# Altium PCB FEU31_Part2.PcbDoc
Units mm, origin at the board's own origin, x right, y up, seen from the top; angles counter-clockwise.
Board outline 43.83 x 14.67 mm, 2 copper layers (Top Layer, Bottom Layer), stack 1.021 mm thick; 24 components, 13 nets, 56 pads, 73 vias.
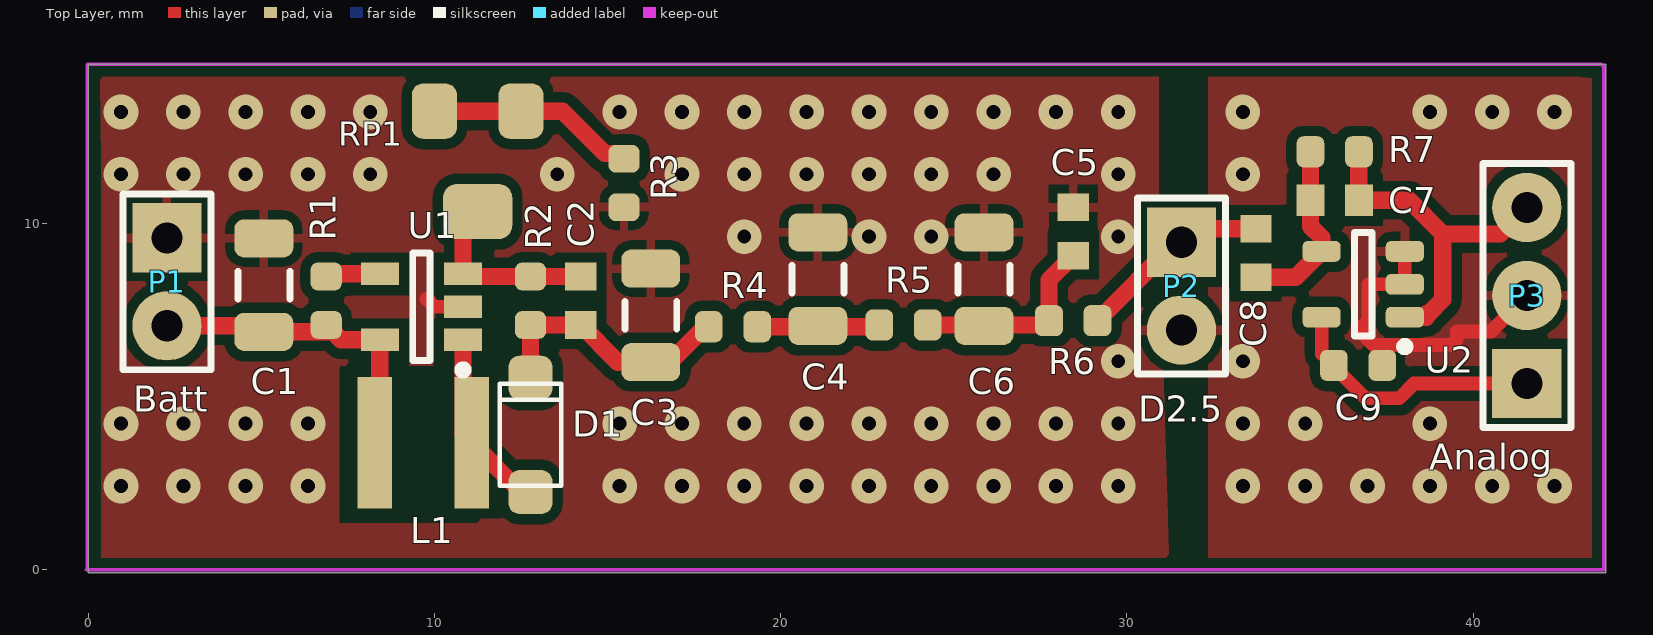
[diagram p0: Top Layer view]
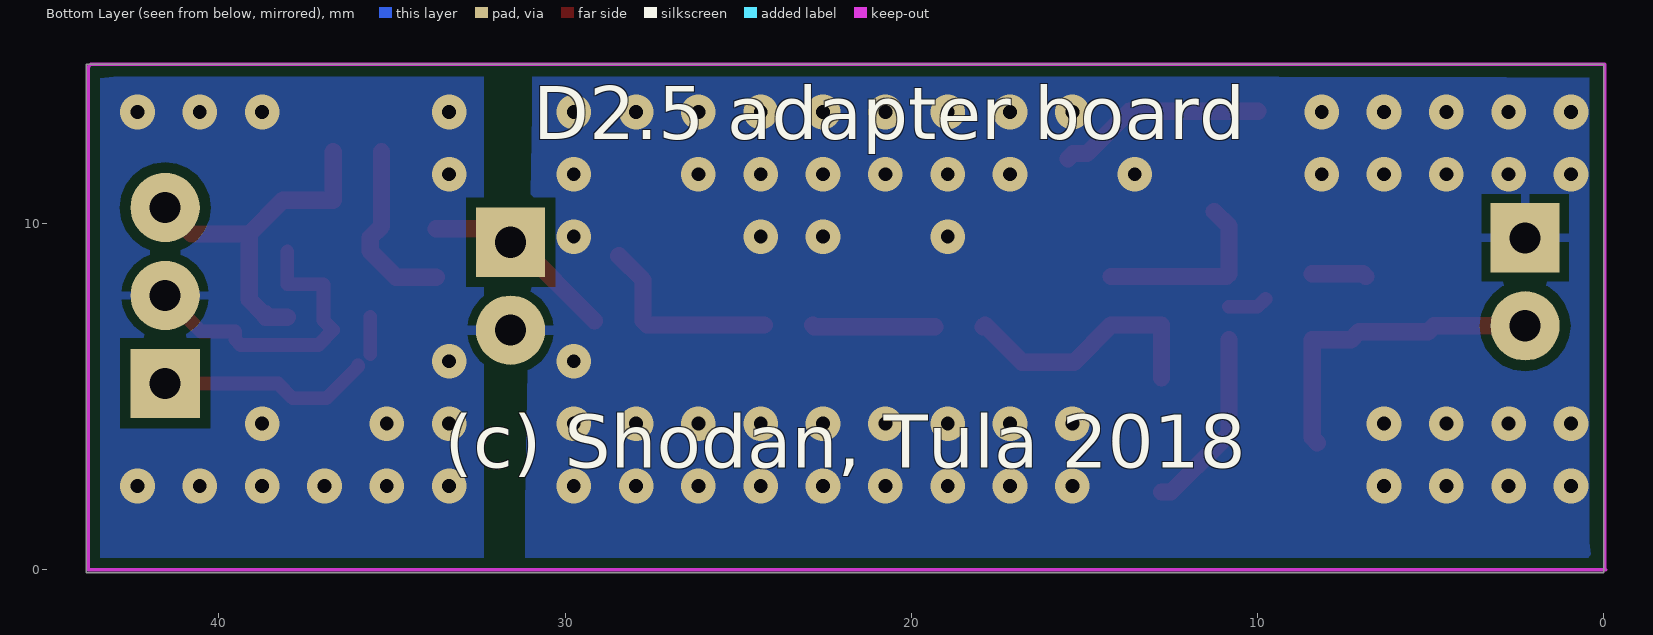
[diagram p1: Bottom Layer view, seen from below]
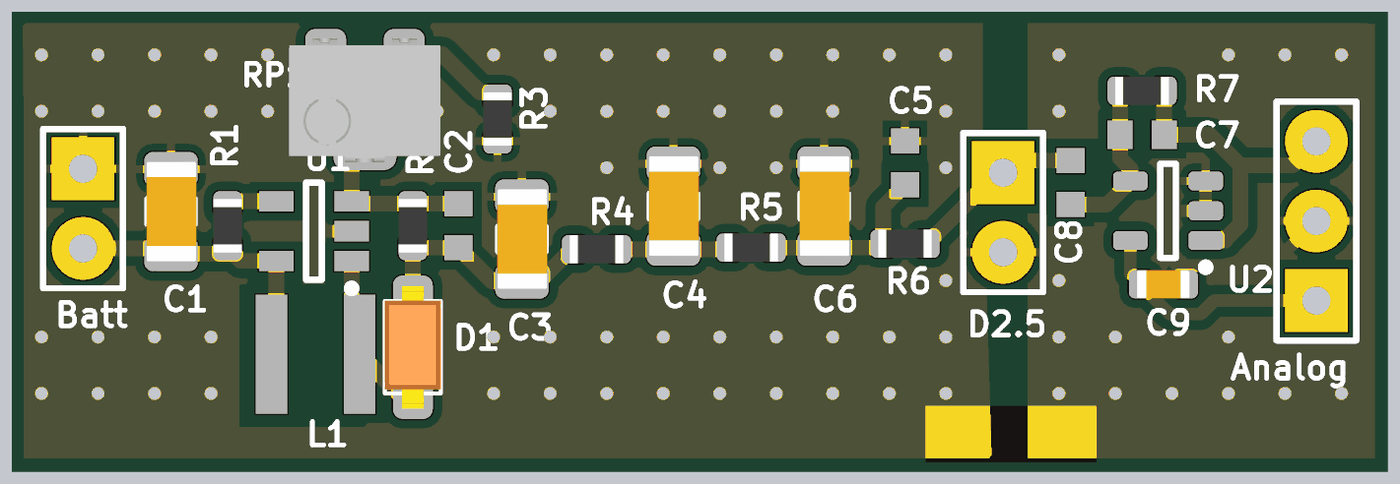
[diagram p2: 3D render of the assembled board from above, using the file's embedded part models]

## Layer stack, top to bottom
Top Solder: solder mask 0.0102, Solder Resist, Dk 3.5
Top Layer: signal copper 0.0356
Dielectric1: dielectric 0.95, FR-4, Dk 4.8
Bottom Layer: signal copper 0.0356
Bottom Solder: solder mask 0.0102, Solder Resist, Dk 3.5

## Board outline
0,-0.075 43.825,-0.075 43.825,14.6 0,14.6

## Design rules (kind name [scope] priority, off if disabled: settings)
Clearance [All] p1: gap=0.3
ComponentClearance [All] p1: gap=0.1 collisioncheckmode=3 verticalgap=0.254 showdistances=TRUE
HoleSize [All] p1: absolutevalues=TRUE maxlimit=2.54 minlimit=0.3 maxpercent=80.000 minpercent=20.000
HoleToHoleClearance [All] p1: gap=0.2 allowstackedmicrovias=TRUE
MinimumAnnularRing [All] p1: minimumring=0.3
MinimumSolderMaskSliver [All] p1: minsoldermaskwidth=0.152
PlaneClearance [All] p1: clearance=2
PlaneConnect [All] p1: planeconnectstyle=Relief reliefexpansion=0.457 reliefentries=4 reliefconductorwidth=0.3 reliefairgap=0.457
PolygonConnect PolygonConnect_via [IsVia] p1: connectstyle=Direct reliefconductorwidth=0.254 reliefentries=4 polygonreliefangle="90 Angle" airgapwidth=0.254
PolygonConnect [All] p2: connectstyle=Relief reliefconductorwidth=0.254 reliefentries=4 polygonreliefangle="90 Angle" airgapwidth=0.254
RoutingVias [All] p1: holewidth=0.3 width=0.62 viastyle="Through Hole" minholewidth=0.3 minwidth=0.62 maxholewidth=6 maxwidth=4
SilkToSilkClearance [All] p1: silktosilkclearance=0.152
SilkToSolderMaskClearance SilkscreenOverComponentPads [IsPad] p1: minsilkscreentomaskgap=0.1 clearancetoexposedcopper=TRUE
SolderMaskExpansion [All] p1: expansion=0.05
Width [All] p1: maxlimit=2.254 minlimit=0.4 preferedwidth=0.4
22 further rules are at their usual default settings.

## Components (designator, comment, footprint, x,y, rotation, side; value= is the part's Value field where it differs from the comment)
C1 "10uF" C1206 5.075,8.225 r90 top
C2 "120pF" 1608[0603] 14.225,7.775 r270 top
C3 "10uF" C1206 16.25,7.35 r90 top
C4 "10uF" C1206 21.075,8.4 r90 top
C5 "100nF" 1608[0603] 28.45,9.775 r270 top
C6 "10uF" C1206 25.875,8.4 r90 top
C7 "0pF" 1608[0603] 36,10.675 r0 top
C8 "470pF" 1608[0603] 33.725,9.15 r270 top
C9 "1uF" 1608[0603]_CAP 36.677,5.907 r0 top
D1 "MBR0540" SOD123 12.775,3.9 r90 top
L1 "Inductor" IFSC1515AHER100M01 7.775,5.575 r0 top
P1 "Batt" HDR1X2 2.275,9.59 r270 top
P2 "D2.5" HDR1X2 31.575,9.465 r270 top
P3 "Analog" HDR1X3 41.55,5.385 r90 top
R1 "62K" 1608[0603]_RES 6.875,7.775 r270 top
R2 "200K" 1608[0603]_RES 12.775,7.775 r90 top
R3 "10K" 1608[0603]_RES 15.475,11.175 r270 top
R4 "10K" 1608[0603]_RES 18.625,7.025 r180 top
R5 "10K" 1608[0603]_RES 23.55,7.075 r180 top
R6 "1M" 1608[0603]_RES 28.45,7.2 r180 top
R7 "10M" 1608[0603]_RES 36,12.075 r0 top
RP1 "10k" 3224W 11.25,10.35 r180 top
U1 "LM2733XMF/NOPB" MF05A_N 9.625,7.6 r180 top
U2 "OPA353NA" ADI-RJ-5_N 36.825,8.25 r180 top

## Footprints (in the part's own frame and the unit in brackets; to place one, negate y for a bottom-side part, rotate by r counter-clockwise, add the part's x,y. Pads: shape width x height; smd on the part's side, far side on the other; paste and mask are expansions set on the pad)
1608[0603] [mm] "Chip Capacitor, Body 1.6x0.8mm, IPC High Density"
  rect 0.8x0.9 smd: 1(-0.7,0) 2(0.7,0)
  body extent -0.87,-0.48 0.87,0.48, height 1.3
1608[0603]_CAP [mm] "Chip Capacitor, Body 1.6x0.8mm, IPC High Density"
  rrect50% 0.8x0.9 smd: 1(-0.7,0) 2(0.7,0)
  body extent -0.85,-0.45 0.85,0.45, height 0.8
1608[0603]_RES [mm] "Chip Capacitor, Body 1.6x0.8mm, IPC High Density"
  rrect50% 0.8x0.9 smd: 1(-0.7,0) 2(0.7,0)
  body extent -0.85,-0.45 0.85,0.45, height 0.45
3224W [mm]
  rrect50% 1.3x1.6 smd: 1(-1.25,-2.9) 2(1.25,-2.9)
  rrect50% 2x1.6 smd: 3(0,0)
  body extent -2.41,-3.4 2.42,0.56, height 5.29
ADI-RJ-5_N [mm] "SOT-23, 5-Leads, Body 2.9x1.6mm, Pitch 0.95mm, IPC Medium Density"
  rrect50% 1.1x0.6 smd: 1(-1.2,0.95) 2(-1.2,0) 3(-1.2,-0.95) 4(1.2,-0.95) 5(1.2,0.95)
  silkscreen extent -1.33,-1.5 0.25,1.92, body extent -0.85,-1.5 0.85,1.5, height 1.45
C1206 [mm] "Chip Capacitor, Body 3.2x1.6mm, IPC High Density"
  rrect50% 1.1x1.7 smd: 1(-1.35,0) 2(1.35,0)
  silkscreen extent -0.4,-0.75 0.4,0.75, body extent -1.6,-0.81 1.6,0.79, height 1.6
HDR1X2 [mm] "Connector; Header; 2 Position"
  rect 2x2 hole 0.9: 1(0,0)
  round 2 hole 0.9: 2(2.54,0)
  silkscreen extent -1.27,-1.27 3.81,1.27
HDR1X3 [mm] "Connector; Header; 3 Position"
  rect 2x2 hole 0.9: 1(0,0)
  round 2 hole 0.9: 2(2.54,0) 3(5.08,0)
  silkscreen extent -1.27,-1.27 6.35,1.27
IFSC1515AHER100M01 [mm]
  rect 1x3.8 smd: 1(0.5,-1.9) 2(3.3,-1.9)
  body extent 0,-3.8 3.8,0, height 1.8
MF05A_N [mm] "SOT23, 5-Leads, Body 2.9x1.6mm, Pitch 0.95mm, Lead Span 2.8mm, IPC Medium Density"
  rect 1.1x0.65 smd: 1(-1.2,0.95) 2(-1.2,0) 3(-1.2,-0.95) 4(1.2,-0.95) 5(1.2,0.95)
  silkscreen extent -1.33,-1.55 0.25,1.95, body extent -0.9,-1.55 0.9,1.55, height 1.19
SOD123 [mil]
  rrect50% 50x50 smd: 1(-65,0) 2(65,0)
  silkscreen extent -58,-35 58,35, body extent -77,-35 77,35, height 47

## Part data
C1 C2 C3 C4 C5 C6 C7 C8 C9: library part "Cap Semi", "Capacitor (Semiconductor SIM Model)"
D1: "SMD 40V 0.5A"
P1 P2: library part "Header 2", "Header, 2-Pin"
P3: library part "Header 3", "Header, 3-Pin"
R1 R2 R3 R4 R5 R6: library part Res2, "Resistor"
R7: library part "Resistor 0805"
RP1: library part "R-Tr 3296W (64W)", "Bourns 3296W 0.5W 25 Turns"
U1: "0.6/1.6 MHz Boost Converters With 40V Internal FET Switch in 5-pin SOT-23, Pb-Free"
U2: library part AD8541ARTZ-R2, "Single Channel RRIO Operational Amplifier, 1 MHz BW, 920 mV/us SR, Industrial, 5-pin SOT23 (RJ-5), Reel"

## Via types
v1: diameter 1, hole 0.4, Top Layer to Bottom Layer, tented both sides, 73 vias

## Nets (pads, with @x,y where several pads share a name; then routed paths per layer and width w, separated by ;. In a path a pad name is that pad's centre, name@x,y a point inside that pad or via, vN(x,y) a via of type N, cw(c..) or ccw(c..) an arc to the next point about the centre after c; other vN are vias at no path point)
+23V: C2.2 C3.1 D1.2 R2.1 R4.2 | length 7.6
  Top Layer w0.5: D1.2 R2.1 C2.2 15.3,6 C3.1 16.8,6 17.875,7.075 R4.2
GND: C1.2 C3.2 C4.2 C5.1 C6.2 C9.2 P1.1 P2.2 P3.2 R3.2 U1.2 U2.2 U2.3 | length 10.3
  Top Layer w0.4: 9.775,7.825 10,7.6 U1.2 ; U2.3 U2.2 36.975,8.25 36.975,7.2 36.7,6.925 37.125,6.5 39.375,6.5 39.525,6.65 39.525,6.885 40.51,6.885 P3.2
  other v1: 0.95,2.425 2.75,2.425 4.55,2.425 6.35,2.425 15.35,2.425 17.15,2.425 18.95,2.425 20.75,2.425 22.55,2.425 24.35,2.425 26.15,2.425 27.95,2.425 29.75,2.425 33.35,2.425 35.15,2.425 36.95,2.425 38.75,2.425 40.55,2.425 42.35,2.425 0.95,4.225 2.75,4.225 4.55,4.225 6.35,4.225 15.35,4.225 17.15,4.225 18.95,4.225 20.75,4.225 22.55,4.225 24.35,4.225 26.15,4.225 27.95,4.225 29.75,4.225 33.35,4.225 35.15,4.225 38.75,4.225 29.75,6.025 33.35,6.025 18.95,9.625 22.55,9.625 24.35,9.625 29.75,9.625 0.95,11.425 2.75,11.425 4.55,11.425 6.35,11.425 8.15,11.425 13.55,11.425 17.15,11.425 18.95,11.425 20.75,11.425 22.55,11.425 24.35,11.425 26.15,11.425 29.75,11.425 33.35,11.425 0.95,13.225 2.75,13.225 4.55,13.225 6.35,13.225 8.15,13.225 15.35,13.225 17.15,13.225 18.95,13.225 20.75,13.225 22.55,13.225 24.35,13.225 26.15,13.225 27.95,13.225 29.75,13.225 33.35,13.225 38.75,13.225 40.55,13.225 42.35,13.225
NetC2_1: C2.1 R2.2 RP1.3 U1.3 | length 5.4
  Top Layer w0.5: RP1.3 10.825,9.925 U1.3 10.9,8.475 C2.1
NetC4_1: C4.1 R4.1 R5.2 | length 3.5
  Top Layer w0.5: R4.1 22.8,7.025 R5.2
NetC5_2: C5.2 C6.1 R5.1 R6.2 | length 5.7
  Top Layer w0.5: R5.1 27.625,7.075 R6.2 27.75,8.375 C5.2
NetC7_1: C7.1 C8.2 R7.1 U2.4 | length 5.2
  Top Layer w0.5: C8.2 34.875,8.45 U2.4 35.625,9.6 35.3,9.925 C7.1 R7.1
NetC8_1: C8.1 P2.1 R6.1 | length 5.7
  Top Layer w0.5: R6.1 31.415,9.465 P2.1 31.96,9.85 C8.1
NetD1_1: D1.1 L1.2 U1.1 | length 5.4
  Top Layer w0.5: U1.1 10.825,3.925 L1.2 12.501,2.249 D1.1
NetR1_1: R1.1 U1.4 | length 1.6
  Top Layer w0.5: R1.1 6.95,8.55 U1.4
NetR3_1: R3.1 RP1.1 RP1.2 | length 6
  Top Layer w0.5: RP1.2 RP1.1 13.7,13.25 14.925,12.025 15.325,12.025 R3.1
SIGOUT: C7.2 P3.3 R7.2 U2.1 | length 10.2
  Top Layer w0.5: R7.2 C7.2 38.15,10.675 39.125,9.7 ; U2.1 38.65,7.3 38.65,7.4 38.715,7.4 39.125,7.81 39.125,9.7 ; P3.3 40.785,9.7 39.125,9.7
VCC: C9.1 P3.1 U2.5 | length 7.4
  Top Layer w0.4: C9.1@35.625,6.238 U2.5 ; C9.1 35.977,5.867 36.887,4.957 37.867,4.957 38.295,5.385 P3.1 P3.1@41.415,5.25
VCC_BAT: C1.1 L1.1 P1.2 R1.2 U1.5 | length 9.4
  Top Layer w0.5: P1.2 4.9,7.05 C1.1 7.075,6.875 7.3,6.65 U1.5 8.425,3.825 L1.1

## Polygon pours and split planes (outlines as drawn)
GND on Top Layer "Top Layer-No Net" (solid, pour order 0): 30.925,9.915 30.925,14.25 2.85,14.25 0.35,14.25 0.375,11.775 0.375,0.275 29.925,0.275 31.212,0.275 31.175,1.525
GND on Top Layer "Top Layer-No Net" (solid, pour order 6): 32.35,0.225 32.35,14.25 42.975,14.25 43.425,14.2 43.425,13.8 43.425,0.675 43.425,0.199 42.95,0.2
GND on Bottom Layer "Top Layer-No Net" (solid, pour order 4): 2.825,14.225 0.425,14.218 0.425,11.825 0.425,0.8 0.35,0.275 29.85,0.275 31.15,0.3 31.15,1.575 31.15,1.925 30.95,13.2 30.95,13.325 30.95,14.3 29.975,14.3
GND on Bottom Layer "Top Layer-No Net" (solid, pour order 8): 32.35,0.225 32.35,14.25 42.975,14.25 43.425,14.2 43.425,13.8 43.425,0.675 43.425,0.225 42.95,0.2

## Keep-outs
Keep-Out Layer:
  lines w0.1: -0.05,0 43.775,0 43.775,14.525 43.7,14.6 -0.025,14.6 -0.025,0.025 -0.05,0

## Other copper
Top Layer:
  pour cut-out: 7.25,5.85 7.3,5.9 11.5,5.9 11.5,1.625 11.225,1.35 7.25,1.35

## Silkscreen, mask and mechanical layers (free items; w line width, h text height)
Bottom Overlay:
  text "D2.5 adapter board" at 30.925,12.435 h1.52
  text "(c) Shodan, Tula 2018" at 33.475,2.95 h1.52
Top Solder:
  rectangle: 29.1,0.225 34.55,2.025
Bottom Solder:
  rectangle: 29.1,0.225 34.55,2.025